# Altium PCB BEE-1012 PAY-IF V1.0.0.PcbDoc (part 2 of 7)
Units mm, origin at the board's own origin, x right, y up, seen from the top; angles counter-clockwise.
Board outline 93 x 90 mm, 6 copper layers (Top_1, GND_2, SIGNAL_3, PWR_4, GND_5, Bottom_6), stack 1.606 mm thick; 497 components, 371 nets, 2212 pads, 1215 vias.
Unrouted connection lines stored in the file: 56.
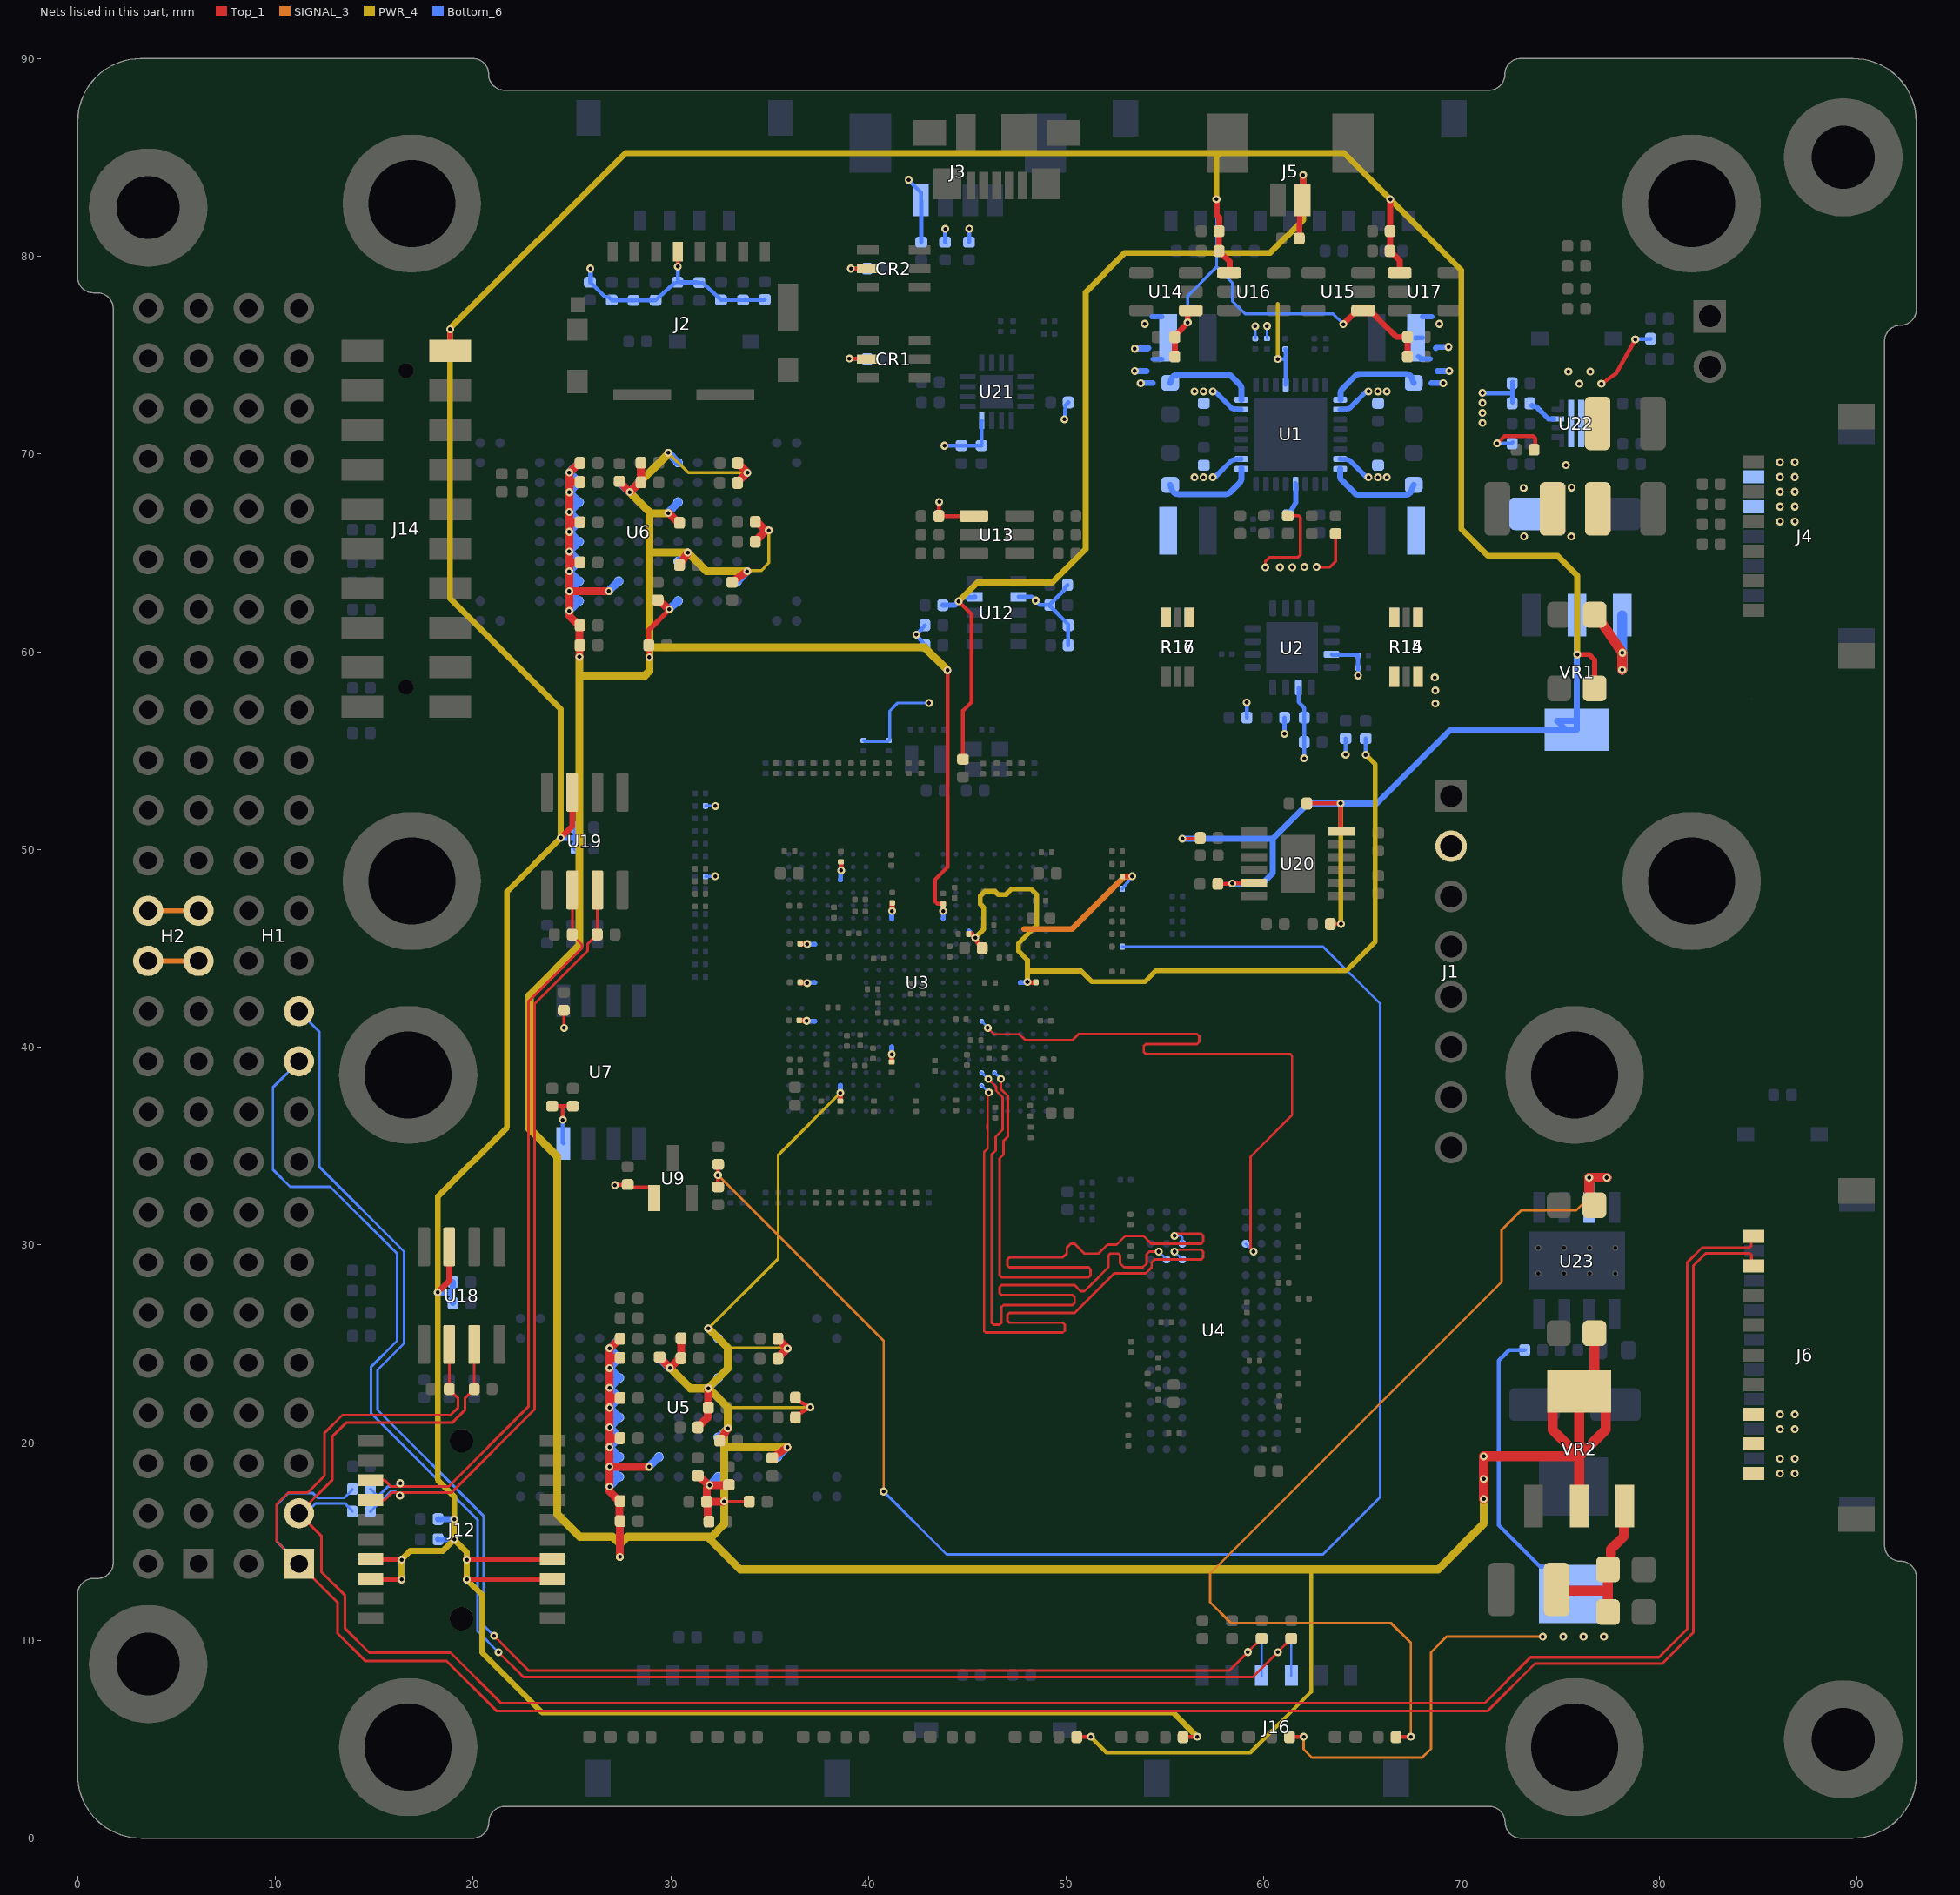
[diagram p6: the nets of this part, all layers, seen from the top]

## Footprints (in the part's own frame and the unit in brackets; to place one, negate y for a bottom-side part, rotate by r counter-clockwise, add the part's x,y. Pads: shape width x height; smd on the part's side, far side on the other; paste and mask are expansions set on the pad) (continued)
MOLEX_5040500891 [mm]
  rect 0.6x1 smd mask+0.076: 1(5.25,-2.87) 2(3.75,-2.87) 3(2.25,-2.87) 4(0.75,-2.87) 5(-0.75,-2.87) 6(-2.25,-2.87) 7(-3.75,-2.87) 8(-5.25,-2.87)
  rect 1.25x1.8 smd mask+0.076: M1(7.855,2.32) M2(-7.855,2.32)
  silkscreen extent -8.27,-3.7 8.27,3.22, body extent -8.27,-3.2 8.27,3.24, height 2
MOLEX_5040500991 [mil]
  rect 26x41 smd paste+0 mask+0: 1(236.22,-119.76) 2(177.17,-119.76) 3(118.11,-119.76) 4(59.06,-119.76) 5(0,-119.76) 6(-59.06,-119.76) 7(-118.11,-119.76) 8(-177.17,-119.76) 9(-236.22,-119.76)
  rect 51x73 smd: M1(-326.97,84.57) M2(326.97,84.57)
  silkscreen extent -344,-150 344,125, body extent -355,-126 355,128, height 79
MSOP-12_MSE_LIT [mil]
  rect 52.5x17 smd paste+0 mask+0: 1(-87.25,64) 2(-87.25,38.4) 3(-87.25,12.8) 4(-87.25,-12.8) 5(-87.25,-38.4) 6(-87.25,-64) 7(87.25,-64) 8(87.25,-38.4) 9(87.25,-12.8) 10(87.25,12.8) 11(87.25,38.4) 12(87.25,64)
  rect 69x116 smd paste-57.5 mask+0: 13(0,0)
  silkscreen extent -138,-86 66,86, body extent -99,-81 99,81, height 43
QFN50P300X300X80-17N [mm]
  rrect7% 0.83x0.26 smd mask+0.04: 1(-1.47,0.75) 2(-1.47,0.25) 3(-1.47,-0.25) 4(-1.47,-0.75) 9(1.47,-0.75) 10(1.47,-0.25) 11(1.47,0.25) 12(1.47,0.75)
  rrect7% 0.26x0.83 smd mask+0.04: 5(-0.75,-1.47) 6(-0.25,-1.47) 7(0.25,-1.47) 8(0.75,-1.47) 13(0.75,1.47) 14(0.25,1.47) 15(-0.25,1.47) 16(-0.75,1.47)
  rect 1.7x1.7 smd paste-0.2 mask+0.04: 17(0,0)
  silkscreen extent -2.6,-1.58 1.58,1.58, body extent -1.5,-1.5 1.5,1.5, height 0.8
QFN-32_5X5_EP3.7X3.7 [mm] "QFN32_5MMwith ePAD"
  rrect50% 0.7x0.3 smd mask+0.04: 1(-2.5,1.75) 2(-2.5,1.25) 3(-2.5,0.75) 4(-2.5,0.25) 5(-2.5,-0.25) 6(-2.5,-0.75) 7(-2.5,-1.25) 8(-2.5,-1.75) 17(2.5,-1.75) 18(2.5,-1.25) 19(2.5,-0.75) 20(2.5,-0.25) 21(2.5,0.25) 22(2.5,0.75) 23(2.5,1.25) 24(2.5,1.75)
  rrect50% 0.3x0.7 smd mask+0.04: 9(-1.75,-2.5) 10(-1.25,-2.5) 11(-0.75,-2.5) 12(-0.25,-2.5) 13(0.25,-2.5) 14(0.75,-2.5) 15(1.25,-2.5) 16(1.75,-2.5) 25(1.75,2.5) 26(1.25,2.5) 27(0.75,2.5) 28(0.25,2.5) 29(-0.25,2.5) 30(-0.75,2.5) 31(-1.25,2.5) 32(-1.75,2.5)
  rect 3.7x3.7 smd mask+0.05: 33(0,0)
  silkscreen extent -2.65,-2.65 2.65,2.68, body extent -2.56,-2.56 2.56,2.56, height 1.01
RES_C_0603X30 [mm] "Chip Resistor, 2-Leads, Body 0.6x0.3mm, IPC Medium Density"
  rrect50% 0.275x0.3 smd mask+0.05: 1(-0.262,0) 2(0.262,0)
  body extent -0.3,-0.15 0.3,0.15, height 0.22
RES_C_1005x30_L [mm] "Chip Resistor, 2-Leads, Body 1.0x0.5mm, IPC Medium Density"
  rrect50% 0.55x0.6 smd mask+0.05: 1(-0.45,0) 2(0.45,0)
  body extent -0.5,-0.3 0.5,0.3, height 0.2
RES_C_1206_SHUNT [mm] "Chip Resistor, 2-Leads, Body 3.2x1.6mm, IPC Medium Density"
  rect 1x0.5 smd mask+0.1: 1(-1.5,0.6) 1(-1.5,-0.6) 2(1.5,0.6) 2(1.5,-0.6)
  rect 1x0.35 smd mask+0.1: 3(-1.5,0) 4(1.5,0)
  silkscreen extent -0.6,-0.77 0.6,0.78, body extent -1.6,-0.8 1.6,0.8, height 1
SAMTEC-TLE-110-01-X-DV-A [mm]
  rect 1.12x2.11 smd mask+0: 1(-9,-2.222) 2(-9,2.222) 3(-7,-2.222) 4(-7,2.222) 5(-5,-2.222) 6(-5,2.222) 7(-3,-2.222) 8(-3,2.222) 9(-1,-2.222) 10(-1,2.222) 11(1,-2.222) 12(1,2.222) 13(3,-2.222) 14(3,2.222) 15(5,-2.222) 16(5,2.222) 17(7,-2.222) 18(7,2.222) 19(9,-2.222) 20(9,2.222)
  round 0.76 hole 0.76 unplated: ""(-8,0) ""(8,0)
  silkscreen extent -10.45,-4.44 10.45,3.73, body extent -9.99,-2.78 9.99,2.78, height 4.32
SAMTEC_ESQ-126-14-G-D [mm]
  rect 1.53x1.53 hole 0.9: 01(0,0)
  round 1.53 hole 0.9: 02(0,2.54) 03(2.54,0) 04(2.54,2.54) 05(5.08,0) 06(5.08,2.54) 07(7.62,0) 08(7.62,2.54) 09(10.16,0) 10(10.16,2.54) 11(12.7,0) 12(12.7,2.54) 13(15.24,0) 14(15.24,2.54) 15(17.78,0) 16(17.78,2.54) 17(20.32,0) 18(20.32,2.54) 19(22.86,0) 20(22.86,2.54) 21(25.4,0) 22(25.4,2.54) 23(27.94,0) 24(27.94,2.54) 25(30.48,0) 26(30.48,2.54) 27(33.02,0) 28(33.02,2.54) 29(35.56,0) 30(35.56,2.54) 31(38.1,0) 32(38.1,2.54) 33(40.64,0) 34(40.64,2.54) 35(43.18,0) 36(43.18,2.54) 37(45.72,0) 38(45.72,2.54) 39(48.26,0) 40(48.26,2.54) 41(50.8,0) 42(50.8,2.54) 43(53.34,0) 44(53.34,2.54) 45(55.88,0) 46(55.88,2.54) 47(58.42,0) 48(58.42,2.54) 49(60.96,0) 50(60.96,2.54) 51(63.5,0) 52(63.5,2.54)
  silkscreen extent -2.27,-1.2 65.03,3.74, body extent -1.52,-1.27 65.02,3.81, height 11.1
SAMTEC_FSI-110-03-X-D-AD-TR [mm]
  rect 0.61x1.26 smd: 01(-4.5,4.59) 02(-3.5,4.59) 03(-2.5,4.59) 04(-1.5,4.59) 05(-0.5,4.59) 06(0.5,4.59) 07(1.5,4.59) 08(2.5,4.59) 09(3.5,4.59) 10(4.5,4.59) 11(4.5,-4.59) 12(3.5,-4.59) 13(2.5,-4.59) 14(1.5,-4.59) 15(0.5,-4.59) 16(-0.5,-4.59) 17(-1.5,-4.59) 18(-2.5,-4.59) 19(-3.5,-4.59) 20(-4.5,-4.59)
  round 1.19 hole 1.19 unplated: ""(-4.5,0) ""(4.5,0)
  silkscreen extent -5.38,-4.38 5.38,5.9, body extent -5.38,-5 5.38,5, height 4.37
SOD123_MCC [mil]
  rect 34x28 smd paste+0: 1(-73,0) 2(73,0)
  silkscreen extent -88,-38 61,42, body extent -76,-33 76,33, height 53
SOIC127P599X175-8N [mm]
  rrect25% 1.97x0.6 smd paste+0 mask+0.102: 1(-2.47,1.905) 2(-2.47,0.635) 3(-2.47,-0.635) 4(-2.47,-1.905) 5(2.47,-1.905) 6(2.47,-0.635) 7(2.47,0.635) 8(2.47,1.905)
  silkscreen extent -4.14,-2.52 1.95,2.52, body extent -3,-2.45 3,2.45, height 1.75
SOIC127P790X216-8N [mm]
  rect 1.65x0.7 smd: 1(-3.6,1.905) 2(-3.6,0.635) 3(-3.6,-0.635) 4(-3.6,-1.905) 5(3.6,-1.905) 6(3.6,-0.635) 7(3.6,0.635) 8(3.6,1.905)
  silkscreen extent -4.27,-2.62 2.42,2.62, body extent -3.95,-2.62 3.95,2.62, height 2.16
SOT-23_MC_MCH [mil]
  rect 24x52 smd paste+0 mask+0: 1(-37.4,-39.97) 2(37.4,-39.97) 3(0,39.97)
  silkscreen extent -65,-94 65,33, body extent -60,-52 60,52, height 44
SRP7050TA-220M [mm]
  rect 2.95x3.5 smd: 1(-2.725,0) 2(2.725,0)
  silkscreen extent -4.4,-3.3 4.4,3.3, body extent -3.65,-3.3 3.65,3.3, height 4.6
SW2-SMD [mm]
  rect 1.2x0.8 smd: 1(-3.5,0) 2(3.5,0)
  silkscreen extent -2.82,-1.85 2.82,1.85, body extent -3.05,-1.85 3.05,1.85, height 2.5
TFBGA-343_14X14 [mm] "BGA, 343-Leads, Body 14,00mm x14,00mm, Pitch 0,65mm"
  round 0.25 smd mask+0.05: A1(-6.5,6.5) A2(-5.85,6.5) A3(-5.2,6.5) A4(-4.55,6.5) A5(-3.9,6.5) A6(-3.25,6.5) A7(-2.6,6.5) A8(-1.95,6.5) A9(-1.3,6.5) A11(0,6.5) A13(1.3,6.5) A14(1.95,6.5) A15(2.6,6.5) A16(3.25,6.5) A17(3.9,6.5) A18(4.55,6.5) A19(5.2,6.5) A20(5.85,6.5) A21(6.5,6.5) AA1(-6.5,-6.5) AA2(-5.85,-6.5) AA3(-5.2,-6.5) AA4(-4.55,-6.5) AA5(-3.9,-6.5) AA6(-3.25,-6.5) AA7(-2.6,-6.5) AA8(-1.95,-6.5) AA9(-1.3,-6.5) AA11(0,-6.5) AA13(1.3,-6.5) AA14(1.95,-6.5) AA15(2.6,-6.5) AA16(3.25,-6.5) AA17(3.9,-6.5) AA18(4.55,-6.5) AA19(5.2,-6.5) AA20(5.85,-6.5) AA21(6.5,-6.5) B1(-6.5,5.85) B2(-5.85,5.85) B3(-5.2,5.85) B4(-4.55,5.85) B6(-3.25,5.85) B7(-2.6,5.85) B9(-1.3,5.85) B13(1.3,5.85) B15(2.6,5.85) B16(3.25,5.85) B18(4.55,5.85) B19(5.2,5.85) B20(5.85,5.85) B21(6.5,5.85) C1(-6.5,5.2) C2(-5.85,5.2) C3(-5.2,5.2) C4(-4.55,5.2) C5(-3.9,5.2) C6(-3.25,5.2) C7(-2.6,5.2) C8(-1.95,5.2) C11(0,5.2) C14(1.95,5.2) C15(2.6,5.2) C16(3.25,5.2) C17(3.9,5.2) C18(4.55,5.2) C19(5.2,5.2) C20(5.85,5.2) C21(6.5,5.2) D1(-6.5,4.55) D2(-5.85,4.55) D3(-5.2,4.55) D4(-4.55,4.55) D5(-3.9,4.55) D6(-3.25,4.55) D7(-2.6,4.55) D8(-1.95,4.55) D9(-1.3,4.55) D13(1.3,4.55) D14(1.95,4.55) D15(2.6,4.55) D16(3.25,4.55) D17(3.9,4.55) D18(4.55,4.55) D19(5.2,4.55) D20(5.85,4.55) D21(6.5,4.55) E1(-6.5,3.9) E3(-5.2,3.9) E4(-4.55,3.9) E5(-3.9,3.9) E6(-3.25,3.9) E7(-2.6,3.9) E8(-1.95,3.9) E14(1.95,3.9) E15(2.6,3.9) E16(3.25,3.9) E17(3.9,3.9) E18(4.55,3.9) E19(5.2,3.9) E21(6.5,3.9) F1(-6.5,3.25) F2(-5.85,3.25) F3(-5.2,3.25) F4(-4.55,3.25) F5(-3.9,3.25) F6(-3.25,3.25) F7(-2.6,3.25) F8(-1.95,3.25) F9(-1.3,3.25) F13(1.3,3.25) F14(1.95,3.25) F15(2.6,3.25) F16(3.25,3.25) F17(3.9,3.25) F18(4.55,3.25) F19(5.2,3.25) F20(5.85,3.25) F21(6.5,3.25) G1(-6.5,2.6) G2(-5.85,2.6) G3(-5.2,2.6) G4(-4.55,2.6) G5(-3.9,2.6) G6(-3.25,2.6) G7(-2.6,2.6) G8(-1.95,2.6) G9(-1.3,2.6) G10(-0.65,2.6) G11(0,2.6) G12(0.65,2.6) G13(1.3,2.6) G14(1.95,2.6) G15(2.6,2.6) G16(3.25,2.6) G17(3.9,2.6) G18(4.55,2.6) G19(5.2,2.6) G20(5.85,2.6) G21(6.5,2.6) H1(-6.5,1.95) H3(-5.2,1.95) H4(-4.55,1.95) H5(-3.9,1.95) H6(-3.25,1.95) H7(-2.6,1.95) H8(-1.95,1.95) H9(-1.3,1.95) H10(-0.65,1.95) H11(0,1.95) H12(0.65,1.95) H13(1.3,1.95) H14(1.95,1.95) H15(2.6,1.95) H16(3.25,1.95) H17(3.9,1.95) H18(4.55,1.95) H19(5.2,1.95) H21(6.5,1.95) J1(-6.5,1.3) J2(-5.85,1.3) J4(-4.55,1.3) J6(-3.25,1.3) J7(-2.6,1.3) J8(-1.95,1.3) J9(-1.3,1.3) J10(-0.65,1.3) J11(0,1.3) J12(0.65,1.3) J13(1.3,1.3) J14(1.95,1.3) J15(2.6,1.3) J16(3.25,1.3) J18(4.55,1.3) J20(5.85,1.3) J21(6.5,1.3) K7(-2.6,0.65) K8(-1.95,0.65) K9(-1.3,0.65) K10(-0.65,0.65) K11(0,0.65) K12(0.65,0.65) K13(1.3,0.65) K14(1.95,0.65) K15(2.6,0.65) L1(-6.5,0) L3(-5.2,0) L7(-2.6,0) L8(-1.95,0) L9(-1.3,0) L11(0,0) L13(1.3,0) L14(1.95,0) L15(2.6,0) L19(5.2,0) L21(6.5,0) M7(-2.6,-0.65) M8(-1.95,-0.65) M9(-1.3,-0.65) M10(-0.65,-0.65) M11(0,-0.65) M12(0.65,-0.65) M13(1.3,-0.65) M14(1.95,-0.65) M15(2.6,-0.65) N1(-6.5,-1.3) N2(-5.85,-1.3) N4(-4.55,-1.3) N6(-3.25,-1.3) N7(-2.6,-1.3) N8(-1.95,-1.3) N9(-1.3,-1.3) N10(-0.65,-1.3) N11(0,-1.3) N12(0.65,-1.3) N13(1.3,-1.3) N14(1.95,-1.3) N15(2.6,-1.3) N16(3.25,-1.3) N18(4.55,-1.3) N20(5.85,-1.3) N21(6.5,-1.3) P1(-6.5,-1.95) P3(-5.2,-1.95) P4(-4.55,-1.95) P5(-3.9,-1.95) P6(-3.25,-1.95) P7(-2.6,-1.95) P8(-1.95,-1.95) P9(-1.3,-1.95) P10(-0.65,-1.95) P11(0,-1.95) P12(0.65,-1.95) P13(1.3,-1.95) P14(1.95,-1.95) P15(2.6,-1.95) P16(3.25,-1.95) P17(3.9,-1.95) P18(4.55,-1.95) P19(5.2,-1.95) P21(6.5,-1.95) R1(-6.5,-2.6) R2(-5.85,-2.6) R3(-5.2,-2.6) R4(-4.55,-2.6) R5(-3.9,-2.6) R6(-3.25,-2.6) R7(-2.6,-2.6) R8(-1.95,-2.6) R9(-1.3,-2.6) R10(-0.65,-2.6) R11(0,-2.6) R12(0.65,-2.6) R13(1.3,-2.6) R14(1.95,-2.6) R15(2.6,-2.6) R16(3.25,-2.6) R17(3.9,-2.6) R18(4.55,-2.6) R19(5.2,-2.6) R20(5.85,-2.6) R21(6.5,-2.6) T1(-6.5,-3.25) T2(-5.85,-3.25) T3(-5.2,-3.25) T4(-4.55,-3.25) T5(-3.9,-3.25) T6(-3.25,-3.25) T7(-2.6,-3.25) T8(-1.95,-3.25) T9(-1.3,-3.25) T13(1.3,-3.25) T14(1.95,-3.25) T15(2.6,-3.25) T16(3.25,-3.25) T17(3.9,-3.25) T18(4.55,-3.25) T19(5.2,-3.25) T20(5.85,-3.25) T21(6.5,-3.25) U1(-6.5,-3.9) U3(-5.2,-3.9) U4(-4.55,-3.9) U5(-3.9,-3.9) U6(-3.25,-3.9) U7(-2.6,-3.9) U8(-1.95,-3.9) U14(1.95,-3.9) U15(2.6,-3.9) U16(3.25,-3.9) U17(3.9,-3.9) U18(4.55,-3.9) U19(5.2,-3.9) U21(6.5,-3.9) V1(-6.5,-4.55) V2(-5.85,-4.55) V3(-5.2,-4.55) V4(-4.55,-4.55) V5(-3.9,-4.55) V6(-3.25,-4.55) V7(-2.6,-4.55) V8(-1.95,-4.55) V9(-1.3,-4.55) V13(1.3,-4.55) V14(1.95,-4.55) V15(2.6,-4.55) V16(3.25,-4.55) V17(3.9,-4.55) V18(4.55,-4.55) V19(5.2,-4.55) V20(5.85,-4.55) V21(6.5,-4.55) W1(-6.5,-5.2) W2(-5.85,-5.2) W3(-5.2,-5.2) W4(-4.55,-5.2) W5(-3.9,-5.2) W6(-3.25,-5.2) W7(-2.6,-5.2) W8(-1.95,-5.2) W11(0,-5.2) W14(1.95,-5.2) W15(2.6,-5.2) W16(3.25,-5.2) W17(3.9,-5.2) W18(4.55,-5.2) W19(5.2,-5.2) W20(5.85,-5.2) W21(6.5,-5.2) Y1(-6.5,-5.85) Y2(-5.85,-5.85) Y3(-5.2,-5.85) Y4(-4.55,-5.85) Y6(-3.25,-5.85) Y7(-2.6,-5.85) Y9(-1.3,-5.85) Y13(1.3,-5.85) Y15(2.6,-5.85) Y16(3.25,-5.85) Y18(4.55,-5.85) Y19(5.2,-5.85) Y20(5.85,-5.85) Y21(6.5,-5.85)
  silkscreen extent -7.15,-7.15 7.15,7.15, body extent -7,-7 7,7, height 1.22
TPL5010DDCR [mm]
  rrect25% 1.45x0.59 smd: 1(-1.155,0.95) 2(-1.155,0) 3(-1.155,-0.95) 4(1.155,-0.95) 5(1.155,0) 6(1.155,0.95)
  silkscreen extent -2.5,-1.57 0.8,1.57, body extent -1.4,-1.45 1.4,1.45, height 1.1
TWBGA96_ISI [mm]
  round 0.406 smd paste+0 mask+0: A1(-3.2,6) A2(-2.4,6) A3(-1.6,6) A7(1.6,6) A8(2.4,6) A9(3.2,6) B1(-3.2,5.2) B2(-2.4,5.2) B3(-1.6,5.2) B7(1.6,5.2) B8(2.4,5.2) B9(3.2,5.2) C1(-3.2,4.4) C2(-2.4,4.4) C3(-1.6,4.4) C7(1.6,4.4) C8(2.4,4.4) C9(3.2,4.4) D1(-3.2,3.6) D2(-2.4,3.6) D3(-1.6,3.6) D7(1.6,3.6) D8(2.4,3.6) D9(3.2,3.6) E1(-3.2,2.8) E2(-2.4,2.8) E3(-1.6,2.8) E7(1.6,2.8) E8(2.4,2.8) E9(3.2,2.8) F1(-3.2,2) F2(-2.4,2) F3(-1.6,2) F7(1.6,2) F8(2.4,2) F9(3.2,2) G1(-3.2,1.2) G2(-2.4,1.2) G3(-1.6,1.2) G7(1.6,1.2) G8(2.4,1.2) G9(3.2,1.2) H1(-3.2,0.4) H2(-2.4,0.4) H3(-1.6,0.4) H7(1.6,0.4) H8(2.4,0.4) H9(3.2,0.4) J1(-3.2,-0.4) J2(-2.4,-0.4) J3(-1.6,-0.4) J7(1.6,-0.4) J8(2.4,-0.4) J9(3.2,-0.4) K1(-3.2,-1.2) K2(-2.4,-1.2) K3(-1.6,-1.2) K7(1.6,-1.2) K8(2.4,-1.2) K9(3.2,-1.2) L1(-3.2,-2) L2(-2.4,-2) L3(-1.6,-2) L7(1.6,-2) L8(2.4,-2) L9(3.2,-2) M1(-3.2,-2.8) M2(-2.4,-2.8) M3(-1.6,-2.8) M7(1.6,-2.8) M8(2.4,-2.8) M9(3.2,-2.8) N1(-3.2,-3.6) N2(-2.4,-3.6) N3(-1.6,-3.6) N7(1.6,-3.6) N8(2.4,-3.6) N9(3.2,-3.6) P1(-3.2,-4.4) P2(-2.4,-4.4) P3(-1.6,-4.4) P7(1.6,-4.4) P8(2.4,-4.4) P9(3.2,-4.4) R1(-3.2,-5.2) R2(-2.4,-5.2) R3(-1.6,-5.2) R7(1.6,-5.2) R8(2.4,-5.2) R9(3.2,-5.2) T1(-3.2,-6) T2(-2.4,-6) T3(-1.6,-6) T7(1.6,-6) T8(2.4,-6) T9(3.2,-6)
  silkscreen extent -5.31,-7.3 5.31,7.3, body extent -5.05,-7.05 5.05,7.05, height 1.2
UQFN-16_4X4_EP2.6X2.6 [mm]
  rrect50% 0.8x0.35 smd paste+0 mask+0.075: 1(-2,0.975) 2(-2,0.325) 3(-2,-0.325) 4(-2,-0.975) 9(2,-0.975) 10(2,-0.325) 11(2,0.325) 12(2,0.975)
  rrect50% 0.35x0.8 smd paste+0 mask+0.057: 5(-0.975,-2) 6(-0.325,-2) 7(0.325,-2) 8(0.975,-2) 13(0.975,2) 14(0.325,2) 15(-0.325,2) 16(-0.975,2)
  rect 2.6x2.6 smd paste-0.25 mask+0.075: 17(0,0)
  silkscreen extent -2.15,-2.15 2.15,2.15, body extent -2,-2 2,2, height 0.5
VQFN-HR-10 [mm]
  rect 0.65x0.3 smd: 1(-0.938,0.692) 4(-0.941,-0.708) 7(0.909,-0.708) 10(0.909,0.692)
  rect 0.25x0.65 smd: 1(-0.738,0.867) 4(-0.741,-0.883) 7(0.709,-0.883) 10(0.709,0.867)
  rect 0.65x0.25 smd: 2(-0.938,0.216) 3(-0.941,-0.233) 8(0.909,-0.233) 9(0.909,0.216)
  rect 0.3x2.4 smd: 5(-0.265,-0.008) 6(0.235,-0.007)
  silkscreen extent -1.3,-1.25 1.28,1.23, body extent -1.03,-1.01 0.97,0.99, height 1
VREG_LM1117MP-3.3/NOPB [mm]
  rect 2.15x0.95 smd: 1(-2.9,2.3) 2(-2.9,0) 3(-2.9,-2.3)
  rect 2.15x3.25 smd: 4(2.9,0)
  silkscreen extent -4.7,-3.25 1.75,3.25, body extent -3.5,-3.25 3.5,3.25, height 1.8
XTAL_ECS2401037B2JTNTR [mm]
  rect 0.85x0.75 smd paste+0 mask+0.102: 1(-0.675,-0.525) 2(0.675,-0.525) 3(0.675,0.525) 4(-0.675,0.525)
  silkscreen extent -0.78,-1.57 -0.58,-1.37, body extent -1,-0.8 1,0.8, height 0.5

## Part data
BT1: library part BT2, "Switch button 2 pin"
C1 C2 C3 C4 C5 C6 C7 C8 C9 C10 C11 C12 C13 C14 C15 C16 C17 C18 C19 C20 C21 C22 C23 C24 C25 C26 C27 C28 C29 C30 C31 C32 C33 C34 C35 C36 C37 C38 C39 C40 C41 C42 C43 C44 C45 C46 C47 C48 C49 C50 C51 C52 C53 C54 C55 C56 C57 C58 C59 C60 C61 C62 C63 C64 C65 C66 C67 C68 C69 C70 C71 C72 C73 C74 C75 C76 C77 C78 C79 C80 C81 C82 C83 C84 C85 C86 C87 C88 C89 C90 C91 C92 C93 C94 C95 C96 C97 C98 C99 C100 C101 C102 C103 C104 C105 C106 C107 C108 C109 C110 C111 C112 C113 C114 C115 C116 C117 C118 C119 C120 C121 C122 C123 C124 C125 C126 C127 C128 C129 C130 C131 C132 C133 C134 C135 C136 C137 C138 C139 C140 C143 C144 C145 C146 C147 C148 C149 C150 C151 C153 C154 C155 C156 C157 C158 C159 C160 C161 C162 C163 C164 C168 C169 C170 C171 C176 C181 C182: library part _CAP_C_2, "CAP CHIP"
C165 C166 C167 C173 C174 C175 C177 C178 C179 C180: library part _CAP_C_High_2, "CAP CHIP High Value"
CR1 CR2: "TVS DIODE 5.5VWM 6TSOP", Manufacturer_Name=Nexperia, Copyright="Copyright (C) 2025 Ultra Librarian. All rights reserved.", Manufacturer_Part_Number=IP4220CZ6,125, RefDes=RefDes, TYPE=Type
D1 D2 D12: library part LED_BLUE
D3 D9 D10: library part LED_GREEN, "LED GREEN CLEAR 0402 SMD"
D4: library part LED_RED, "LED RED CLEAR 0402 SMD"
D5 D7: "DIODE SCHOTTKY 40V 5A SMA", MPN=SS34, Solder=SMT
D6 D11 D13: "Description", Manufacturer_Name=MCC, Copyright="Copyright (C) 2026 Ultra Librarian. All rights reserved.", Manufacturer_Part_Number=1N4148W-TP
D8: library part LED_YELLOW, "LED YELLOW CLEAR 0402 SMD"
H1 H2: "CONN SOCKET 52POS 0.1 GOLD PCB", Package=None, Availability=Unavailable, MF=Samtec, MP=ESQ-126-14-G-D, Price=None
H3 H4 H5 H6 H7 H8 H9 H10: library part M4.4, "WA-SMSI SMT Steel Spacer with / internal Thread"
J2: "9 (8 + 1) Position Card Connector Secure Digital - microSDâ„¢ Surface Mount, Right Angle Gold", Package=None, Check_prices=https://www.snapeda.com/parts/1051620001/Molex/view-part/?ref=eda, MF=Molex, MP=1051620001, SnapEDA_Link=https://www.snapeda.com/parts/1051620001/Molex/view-part/?ref=snap
J3 J13: library part "Header 4x1_2M"
J4: "1.50mm Pitch, Pico-Lock PCB Header, Single Row, Right-Angle, Surface Mount, Gold (Au) Plating, Positive Lock, 5 Circuits, Tape and Reel", Manufacturer_Name="Molex Connector Corporation", Copyright="Copyright (C) 2025 Ultra Librarian. All rights reserved.", Manufacturer_Part_Number=5040500591, RefDes=RefDes, TYPE=Type
J5: library part "Header 2x1_2M"
J6 J11: "Connector Header Surface Mount, Right Angle 9 position 0.059\" (1.50mm)"
J7: "Connector Header Surface Mount, Right Angle 8 position 0.059\" (1.50mm)`"
J8 J15 J16: "1.50mm Pitch, Pico-Lock PCB Header, Single Row, Right-Angle, Surface Mount, Gold (Au) Plating, Positive Lock, 6 Circuits, Tape and Reel", Manufacturer_Name="Molex Connector Corporation", Copyright="Copyright (C) 2025 Ultra Librarian. All rights reserved.", Datasheet=https://www.molex.com/en-us/products/part-detail-pdf/5040500691?display=pdf, Manufacturer_Part_Number=5040500691, RefDes=RefDes, TYPE=Type
J12: library part FSI-110-03-X-D-AD-TR, "CONN STACKING 20POS SMD GOLD", Package=None, Availability=Unavailable, MP=FSI-110-03-X-D-AD-TR, Price=None
J14: library part SAMTEC-TLE-110-01-X-DV-A, "CONN RCPT 20POS 0.079 GOLD SMD", Package=None, Availability=Unavailable, MP=SAMTEC-TLE-110-01-X-DV-A, Price=None
L1 L2 L3 L4: library part DFE252012P-1R5M=P2, "Fixed Inductor 1.5uH 3.5A R060 SMD", Package=None, Availability=Unavailable, MP=DFE252012P-1R5M=P2, Price=None
L5: library part _IND, "FIXED IND 22UH 2.5A 170 MOHM SMD"
R1 R2 R3 R4 R5 R6 R7 R8 R9 R10 R11 R12 R13 R18 R19 R20 R21 R22 R23 R24 R25 R26 R27 R28 R29 R30 R31 R32 R33 R34 R35 R36 R37 R38 R39 R40 R41 R42 R43 R44 R45 R46 R47 R48 R49 R50 R51 R52 R53 R54 R55 R56 R57 R58 R59 R60 R61 R62 R63 R64 R65 R66 R67 R68 R69 R70 R71 R72 R73 R74 R75 R76 R77 R78 R79 R80 R81 R82 R83 R84 R85 R86 R87 R88 R89 R90 R91 R92 R93 R94 R95 R96 R97 R98 R99 R100 R101 R102 R103 R104 R105 R106 R107 R108 R109 R110 R111 R112 R113 R114 R115 R116 R117 R118 R119 R120 R121 R122 R123 R124 R125 R126 R127 R128 R129 R130 R131 R132 R133 R134 R135 R136 R137 R138 R139 R140 R141 R142 R143 R144 R145 R146 R147 R148 R149 R150 R151 R152 R153 R154 R155 R156 R157 R158 R159 R160 R161 R164 R165 R166 R167 R168 R169 R170 R171 R172 R173 R174 R175 R176 R177 R178 R179 R180 R181 R182 R184 R185 R186 R187 R188 R189 R190 R191 R192 R193 R194 R195 R196 R197 R198 R199 R200 R201 R202 R203 R204 R205 R206 R207 R208 R209 R210 R211 R212 R213 R214 R215 R216 R217 R218 R219 R220 R221 R222 R223 R224 R225 R226 R227 R228 R229 R230 R231 R232 R233 R234 R235 R236 R237 R238 R239 R240 R241 R242 R243: library part _RES_B_2, "RES"
R14 R15 R16 R17: library part SHUNT, "Shunt Resistor, RES 0.047 OHM 1% 3/4W 1206", Current=4A, Manufacturer 1=SUSUMU, Manufacturer Part Number 1=KRL1632E-M-R047-F-T5, Operating Temperature="-55C to 155C", Package=1206, Power=3/4W, Supplier Part Number 1=408-1578-2-ND, Temperature Coefficient=±50ppm/C, Tolerance=1%, Category=Resistor, ComponentLink1Description="SVN Datasheet", ComponentLink1URL=https://chn-vm-apps.microchip.com/mchprepo/parts/Datasheets/n_catalog_partition09_en.pdf, ComponentLink2Description="Local Datasheet", ComponentLink2URL=C:\ALTIUM_WORK\00001_MCHP-CDB\Datasheets\n_catalog_partition09_en.pdf, ComponentLink3Description="Open Symbol", ComponentLink3URL="C:\ALTIUM_WORK\00001_MCHP-CDB\Library\LibraryRefs\Shunt 4 Pin.SchLib", ComponentLink4Description="Open Footprint", ComponentLink4URL=C:\ALTIUM_WORK\00001_MCHP-CDB\Library\Footprints\RES_C_1206_SHUNT.PcbLib, ComponentLink5Description="Open Footprint 2", ComponentLink6Description="Open Footprint 3", ComponentLink7Description="Open Footprint 4", Composition=MF, Description_="RES SHUNT MF 0.047R 1% 3/4W SMD 1206", Dev Tools Status=Design, MCHP-ID=RSMT1405, Owner="Ciprian Abramov", Populated=YES, Quantity Override=1, Restricted Sourcing=No, Revision=1, Status="MCL Design", Supplier 1=Digi-Key, Symbol="Shunt 4 Pin", TYPE=Shunt
U1: library part MIC8878, Manufacturer 1="Microchip Technology", Manufacturer Part Number 1=MCP16502TAB-E/S8B, Supplier Part Number 1=150-MCP16502TAB-E/S8BCT-ND, Category=MCHP-Analog, ComponentLink1Description="SVN Datasheet", ComponentLink2Description="Local Datasheet", ComponentLink2URL=C:\ALTIUM_WORK\00001_MCHP-CDB\Datasheets\MCP16502-High-Performance-PMIC-for-SAMA5DX-SAM9X6-MPUs-Data-Sheet-DS20006275B.pdf, ComponentLink3Description="Open Symbol", ComponentLink3URL="C:\ALTIUM_WORK\00001_MCHP-CDB\Library\LibraryRefs\MCP16502 QFN-32.SchLib", ComponentLink4Description="Open Footprint", ComponentLink4URL=C:\ALTIUM_WORK\00001_MCHP-CDB\Library\Footprints\QFN-32_5X5_EP3.7X3.7.PcbLib, ComponentLink5Description="Open Footprint 2", ComponentLink6Description="Open Footprint 3", ComponentLink7Description="Open Footprint 4", Description_="MCHP ANALOG PMIC SWITCHER Buck ADJ MCP16502TAB-E/S8B QFN-32 for SAMA7G5 MPU with LPDDR/DDR2/DDR3", Dev Tools Status=Design, MCHP-ID=MIC8878, Owner="Dragos Danaila", Populated=YES, Quantity Override=1, Revision=1, Status="MCL Design", Supplier 1=Digi-Key, Symbol="MCP16502 QFN-32", TYPE=Switcher
U2: library part PAC1934T-I/JQ, "IC CURRENT MONITOR 1% 16UQFN", Manufacturer 1="Microchip Technology", Operating Temperature="-40C to +85C", Category=MCHP-Analog, ComponentLink1Description="SVN Datasheet", ComponentLink1URL=https://www.microchip.com/sitesearch/search/Product%20and%20Development%20Tools/PAC1934T-I/JQ, ComponentLink2Description="Local Datasheet", ComponentLink3Description="Open Symbol", ComponentLink3URL="C:\ALTIUM_WORK\00001_MCHP-CDB\Library\LibraryRefs\PAC1934 UQFN-16.SchLib", ComponentLink4Description="Open Footprint", ComponentLink4URL=C:\ALTIUM_WORK\00001_MCHP-CDB\Library\Footprints\UQFN-16_4X4_EP2.6X2.6.PcbLib, ComponentLink5Description="Open Footprint 2", ComponentLink6Description="Open Footprint 3", ComponentLink7Description="Open Footprint 4", Description_="MCHP ANALOG POWER CURRENT SENSE MONITOR PAC1934T-I/JQ UQFN-16", Dev Tools Status=Production, Manufacturer Part Number 1=PAC1934T-I/JQ, MCHP-ID=MIC7010, Owner="Razvan Cristescu", Populated=YES, Quantity Override=1, Restricted Sourcing=No, Revision=2, Status="MCL Design", Supplier 1="Microchip Technology", Supplier Part Number 1=PAC1934T-I/JQ, Symbol="PAC1934 UQFN-16", TYPE="Power/Current Sensor"
U3: "SAMA7D65 MPU 1000MHz Cortex-A7 TFBGA-343", Manufacturer 1="Microchip Technology", Manufacturer Part Number 1=SAMA7D65-V/4HB-SL3, Operating Temperature="-40C to +105C", Category=MCHP-Microcontroller, ComponentLink1Description="SVN Datasheet", ComponentLink1URL=https://www.microchip.com/sitesearch/search/Product%20and%20Development%20Tools/SAMA7D65-V/4HB-SL3, ComponentLink2Description="Local Datasheet", ComponentLink3Description="Open Symbol", ComponentLink3URL=C:\ALTIUM_WORK\00001_MCHP-CDB\Library\LibraryRefs\SAMA7D65-TFBGA-343.SchLib, ComponentLink4Description="Open Footprint", ComponentLink4URL=C:\ALTIUM_WORK\00001_MCHP-CDB\Library\Footprints\TFBGA-343_14x14.PcbLib, ComponentLink5Description="Open Footprint 2", ComponentLink6Description="Open Footprint 3", ComponentLink7Description="Open Footprint 4", Description_="MCHP MPU 32-BIT Cortex-A7 1000MHz 128kB SAMA7D65-V/4HB-SL3 TFBGA-343", Dev Tools Status=Design, MCHP-ID=IC2674, Owner="Ciprian Abramov", Populated=YES, Quantity Override=1, Restricted Sourcing=No, Revision=1, Status="MCL Design", Supplier 1="Microchip Technology", Supplier Part Number 1=SAMA7D65-V/4HB-SL3, Symbol=SAMA7D65-TFBGA-343, TYPE="32-Bit MPU"
U4: library part IC_RAM_IS43TR16512BL-125KBLI, "DDR3L", Manufacturer_Name=ISSI, Copyright="Copyright (C) 2025 Ultra Librarian. All rights reserved.", Manufacturer_Part_Number=IS43TR16512BL-125KBLI, RefDes=RefDes, TYPE=Type
U7: "MRAM Avalanche High Performance Serial P-SRAM 4Mb in SOIC8 package with QSPI - 108MHz interface, 3V, -40 C to 105 C", Manufacturer_Name="Avalanche Technology", Mouser Part Number=793-30042040108X0PSY, Datasheet Link=https://www.mouser.ph/ProductDetail/Avalanche-Technology/AS3004204-0108X0PSAY?qs=eP2BKZSCXI7G0ggegRejGg%3D%3D, Geometry.Height=2.16mm, Manufacturer_Part_Number=AS3004204-0108X0PSAY, Mouser Price/Stock=https://www.mouser.co.uk/ProductDetail/Avalanche-Technology/AS3004204-0108X0PSAY/?qs=eP2BKZSCXI7G0ggegRejGg%3D%3D
U8: "Micro-USB B Receptacle with Flange, Bottom Mount, Surface Mount, Lead-Free", Manufacturer_Name="Molex Connector Corporation", Copyright="Copyright (C) 2025 Ultra Librarian. All rights reserved.", Manufacturer_Part_Number=473460001, RefDes=RefDes, TYPE=Type
U9: "SENSOR ANALOG -40C-125C SOT23-3", Manufacturer_Name=Microchip, Copyright="Copyright (C) 2025 Ultra Librarian. All rights reserved.", Manufacturer_Part_Number=TC1047AVNBTR, RefDes=RefDes, TYPE=Type
U12: "Real-Time Clock Module with I2C-Bus", Package=None, Availability=Unavailable, MP=RV-3129-C3-32.768KHZ-OPTION-A-TB-QA, Price=None
U13: "OSC PROG TIMER TSOT23-6"
U14 U15: "Automotive LVDS Differential Driver"
U16 U17: "Automotive LVDS Differential Line Receiver"
U18 U19: "3.3 V CAN Transceiver with Standby Mode", Package="SOIC-8 Texas Instruments", Check_prices=https://www.snapeda.com/parts/SN65HVD230DR/Texas+Instruments/view-part/?ref=eda, MF="Texas Instruments", MP=SN65HVD230DR, SnapEDA_Link=https://www.snapeda.com/parts/SN65HVD230DR/Texas+Instruments/view-part/?ref=snap
U20: library part LTC2865HMSETRPBF, "Â±60V Fault Protected 3V to 5.5V RS485/RS422 Transceivers", Manufacturer_Name="Analog Devices Inc", Copyright="Copyright (C) 2025 Ultra Librarian. All rights reserved.", Manufacturer_Part_Number=LTC2865HMSE#TRPBF, RefDes=RefDes, TYPE=Type
U21: library part IC_USB_SW_FSUSB74MPX, "USB Switch IC 1 Channel 16-MLP (3x3)", Package="WQFN-16 ON Semiconductor", Check_prices=https://www.snapeda.com/parts/FSUSB74MPX/Onsemi/view-part/?ref=eda, MF="ON Semiconductor", MP=FSUSB74MPX, SnapEDA_Link=https://www.snapeda.com/parts/FSUSB74MPX/Onsemi/view-part/?ref=snap
U23: "5.5V to 36V Input, 3A, 500kHz Step-Down Converter", Package="HSOIC-8 Texas Instruments", Availability="In Stock", Check_prices=https://www.snapeda.com/parts/TPS5430DDAR/Texas+Instruments/view-part/?ref=eda, MF="Texas Instruments", MP=TPS5430DDAR, Price=None, Purchase-URL=https://pricing.snapeda.com/search/part/TPS5430DDAR/?ref=eda, SnapEDA_Link=https://www.snapeda.com/parts/TPS5430DDAR/Texas+Instruments/view-part/?ref=snap
VR1 VR2: "800-mA 15-V linear voltage regulator", Package="SOT-223-4 Texas Instruments", Check_prices=https://www.snapeda.com/parts/LM1117MP-3.3/NOPB/Texas+Instruments/view-part/?ref=eda, MF="Texas Instruments", MP=LM1117MP-3.3/NOPB, SnapEDA_Link=https://www.snapeda.com/parts/LM1117MP-3.3/NOPB/Texas+Instruments/view-part/?ref=snap
Y1: library part ECS-240-10-37B2-JTN-TR, "CRYSTAL 24 MHZ 10PF SMD", Load Capacitance=10pF, Manufacturer 1="ECS Inc", Operating Temperature="-40C to +85C", Package=L2.0W1.6H0.5, Supplier Part Number 1=50-ECS-240-10-37B2-JTN-TR-ND, Tolerance=20ppm, Category=Crystal/Oscillator, ComponentLink1Description="SVN Datasheet", ComponentLink1URL=https://chn-vm-apps.microchip.com/mchprepo/parts/Datasheets/ECX-1637B2.pdf, ComponentLink2Description="Local Datasheet", ComponentLink2URL=C:\ALTIUM_WORK\00001_MCHP-CDB\Datasheets\ECX-1637B2.pdf, ComponentLink3Description="Open Symbol", ComponentLink3URL="C:\ALTIUM_WORK\00001_MCHP-CDB\Library\LibraryRefs\Crystal 4 Pins.SchLib", ComponentLink4Description="Open Footprint", ComponentLink4URL=C:\ALTIUM_WORK\00001_MCHP-CDB\Library\Footprints\CRYSTAL_L2.0W1.6H0.5_FA-128.PcbLib, ComponentLink5Description="Open Footprint 2", ComponentLink6Description="Open Footprint 3", ComponentLink7Description="Open Footprint 4", Description_="CRYSTAL 24MHz 10pF SMD L2W1.6H0.5", Dev Tools Status=Design, Manufacturer Part Number 1=ECS-240-10-37B2-JTN-TR, MCHP-ID=OSC1299, Owner="Ciprian Abramov", Populated=YES, Quantity Override=1, Revision=1, Status="MCL Design", Supplier 1=Digi-Key, Symbol="Crystal 4 Pins", TYPE=Crystal
Y2: library part "FC-12M 32.7680KA-A3", "CRYSTAL 32.7680KHZ 12.5PF SMD", Load Capacitance=12.5pF, Manufacturer 1=Epson, Operating Temperature="-40°C ~ 85°C", Package="2-SMD, No Lead", Supplier Part Number 1=SER3672CT-ND, Tolerance=20ppm, Category=Crystal/Oscillator, ComponentLink1Description="SVN Datasheet", ComponentLink1URL=https://chn-vm-apps.microchip.com/mchprepo/parts/Datasheets/FC-12D_en.pdf, ComponentLink2Description="Local Datasheet", ComponentLink2URL=C:\ALTIUM_WORK\00001_MCHP-CDB\Datasheets\FC-12D_en.pdf, ComponentLink3Description="Open Symbol", ComponentLink3URL="C:\ALTIUM_WORK\00001_MCHP-CDB\Library\LibraryRefs\Crystal 2 Pins.SchLib", ComponentLink4Description="Open Footprint", ComponentLink4URL=C:\ALTIUM_WORK\00001_MCHP-CDB\Library\Footprints\CRYSTAL_FC-12M_L2.05W1.2H0.6.PcbLib, ComponentLink5Description="Open Footprint 2", ComponentLink6Description="Open Footprint 3", ComponentLink7Description="Open Footprint 4", Description_="CRYSTAL 32.768KHZ 12.5PF SMD 2-SMD, No Lead, FC-12M 32.7680KA-A3", Dev Tools Status=Design, Manufacturer Part Number 1="FC-12M 32.7680KA-A3", MCHP-ID=OSC1269, Owner="Dragos Danaila", Populated=YES, Quantity Override=1, Revision=1, Status="MCL Design", Supplier 1=Digikey, Symbol="Crystal 2 Pins", TYPE=Crystal

## Via types
v1: diameter 0.4, hole 0.2, Top_1 to Bottom_6, tented both sides, 1215 vias

## Nets (pads, with @x,y where several pads share a name; then routed paths per layer and width w, separated by ;. In a path a pad name is that pad's centre, name@x,y a point inside that pad or via, vN(x,y) a via of type N, cw(c..) or ccw(c..) an arc to the next point about the centre after c; other vN are vias at no path point)
3.3_VBAT: C144.2 C176.1 J5.1 R28.1 U12.9 | length 48.8
  Top_1 w0.2: v1(44.556,62.551) 45.212,61.895 45.212,57.447 44.781,57.016 R28.1@44.781,54.56
  Top_1 w0.3: C176.1@61.791,80.899 61.801,80.909 61.801,82.668 J5.1@61.958,82.825 61.972,82.84 61.972,84.096 v1(61.987,84.11)
  PWR_4 w0.3: v1(44.556,62.551) 45.505,63.5 49.296,63.5 50.982,65.186 50.982,78.177 52.971,80.166 60.321,80.166 61.987,81.832 v1(61.987,84.11)
  Bottom_6 w0.254: C144.2@43.757,62.357 44.362,62.357 v1(44.556,62.551) 44.75,62.745 45.351,62.745 U12.9@45.382,62.776
3V3: C6.2 C7.2 C8.2 C9.2 C41.2 C42.2 C43.2 C44.2 C47.2 C48.2 C49.2 C50.2 C51.2 C130.2 C131.2 C132.2 C134.2 C135.2 C136.2 C137.2 C140.2 C143.2 C145.2 C163.2 C164.2 CR1.5 CR2.5 J1.2 J2.P4 J3.1 R4.1 R5.1 R7.2 R8.2 R9.2 R10.2 R14.2 R18.1 R19.1 R36.1 R43.1 R51.1 R52.1 R54.1 R57.1 R122.1 R150.2 R151.2 R152.2 R153.2 R154.2 R155.2 R156.2 R157.1 R159.1 R160.1 R164.1 R165.1 R166.1 R197.2 U2.2 U2.15 U3.C17 U3.F13 U3.G7 U3.H19 U3.L3 U3.L19 U3.P19 U3.T13 U7.8 U9.1 U12.2 U13.1 U21.4 | length 116
  Top_1 w0.15: R157.1@24.587,41.866 24.593,41.86 24.593,40.984 v1(24.6,40.977) ; v1(60.071,64.262) 60.075,64.266 60.075,64.559 60.286,64.77 61.722,64.77 61.849,64.897 61.849,66.792 61.77,66.871 R122.1@61.214,66.871
  Top_1 w0.2: C134.2@24.003,37.015 24.526,37.015 ; v1(24.538,36.324) 24.526,36.336 24.526,37.015 ; C135.2@25.049,37.015 24.526,37.015 ; v1(27.178,33.02) 27.194,33.036 27.807,33.036 C137.2@27.823,33.052 27.96,32.915 28.954,32.915 29.159,32.71 U9.1@29.159,32.36 ; v1(30.357,79.478) J2.P4@30.357,80.226 ; v1(39.04,74.828) 39.052,74.816 39.961,74.816 CR1.5@39.973,74.803 ; v1(39.116,79.375) CR2.5@39.973,79.375 ; v1(43.576,67.571) 43.569,67.564 43.569,66.871 C145.2@43.561,66.863 U13.1@45.327,66.863 ; R19.1@52.84,48.641 v1(53.34,48.641)
  Top_1 w0.25: C51.2@36.501,41.358 36.513,41.345 36.862,41.345 v1(36.875,41.332) ; C49.2@36.543,43.283 36.543,43.273 36.556,43.261 36.881,43.261 v1(36.903,43.239) ; C42.2@36.543,45.233 36.555,45.221 36.891,45.221 v1(36.903,45.209) ; C44.2@38.606,49.37 38.611,49.365 38.611,48.946 v1(38.616,48.941) ; C47.2@41.174,39.256 41.174,39.633 v1(41.178,39.637) ; v1(41.189,46.887) 41.197,46.895 41.197,47.283 C41.2@41.206,47.295 ; C48.2@45.075,45.741 45.199,45.741 v1(45.403,45.537) 45.647,45.087 C50.2@45.728,44.937 ; v1(48.04,43.303) 48.069,43.274 48.429,43.274 C43.2@48.441,43.262
  SIGNAL_3 w0.3: 47.879,45.974 50.292,45.974 52.94,48.622 53.321,48.622 v1(53.34,48.641)
  PWR_4 w0.25: v1(45.403,45.537) 45.829,45.963 45.829,47.056 45.652,47.233 45.652,47.64 45.901,47.89 46.387,47.89 46.566,47.711 46.949,47.711 47.244,48.006 48.215,48.006 48.519,47.702 48.519,46.181 47.594,45.255 47.594,44.855 48.04,44.408 48.04,43.855 ; v1(48.04,43.303) 48.04,43.855 ; v1(65.151,54.785) 65.636,54.3 65.636,45.339 64.163,43.866 54.534,43.866 53.975,43.307 51.308,43.307 50.76,43.855 48.04,43.855
  Bottom_6 w0.127: R8.2@59.563,75.836 v1(59.563,76.462) ; R7.2@60.16,75.842 v1(60.16,76.468)
  Bottom_6 w0.15: R54.1@31.758,48.641 v1(32.25,48.641) ; R36.1@31.758,52.197 v1(32.258,52.197) ; R57.1@39.751,55.507 39.826,55.445 40.946,55.445 R43.1@41.021,55.507 41.07,55.556 41.07,57.006 41.467,57.404 v1(43.059,57.404) ; R18.1@52.84,48.006 52.903,48.081 v1(53.34,48.641)
  Bottom_6 w0.2: v1(24.538,36.324) 24.538,35.172 U7.8@24.573,35.137 ; R156.2@25.908,78.682 25.933,78.682 26.681,77.934 26.863,77.934 R152.2@27.015,77.782 27.018,77.778 29.225,77.778 R155.2@29.228,77.775 29.389,77.912 30.163,78.629 cw(c30.299,78.482) 30.173,78.637 C130.2@30.335,78.682 ; v1(30.357,79.478) 30.357,78.819 C130.2@30.335,78.682 ; R151.2@34.762,77.811 34.748,77.796 32.563,77.796 R154.2@32.549,77.782 32.411,77.92 31.645,78.616 ccw(c31.51,78.468) 31.604,78.644 C132.2@31.442,78.668 31.279,78.68 30.498,78.68 C130.2@30.335,78.682 ; v1(39.04,74.828) 39.052,74.816 39.923,74.816 C131.2@39.936,74.803 ; v1(39.116,79.375) C140.2@39.936,79.375 ; v1(42.034,83.86) 42.034,83.842 42.651,83.225 J3.1@42.651,82.825 42.672,82.804 C136.2@42.672,80.714 ; R52.1@42.857,60.325 42.72,60.487 v1(42.426,60.863) 42.72,61.179 R165.1@42.857,61.341 ; v1(43.847,70.419) 43.851,70.423 44.7,70.423 C163.2@44.704,70.427 C164.2@45.72,70.427 45.726,70.433 45.726,71.676 U21.4@45.732,71.682 ; R159.1@43.869,80.705 R159.1@43.878,80.714 43.878,81.376 v1(43.888,81.385) ; R160.1@45.085,80.714 45.094,80.723 45.094,81.385 v1(45.104,81.395) ; U12.2@47.582,62.776 48.265,62.776 v1(48.455,62.586) 48.678,62.363 C143.2@49.168,62.363 ; v1(49.911,71.755) R197.2@49.97,72.446 ; R197.2@49.955,72.336 49.955,72.457 R197.2@50.107,72.608 R197.2@49.97,72.446 ; 49.956,72.287 R197.2@49.97,72.446 ; R166.1@50.068,63.379 49.916,63.227 49.916,63.136 49.168,62.388 C143.2@49.168,62.363 ; R51.1@50.107,60.325 R164.1@50.107,61.341 50.107,61.383 49.168,62.321 C143.2@49.168,62.363 ; v1(59.13,57.431) 59.134,57.427 59.134,56.672 R4.1@59.139,56.668 ; v1(61.044,55.848) R5.1@61.044,56.668 ; U2.2@61.752,58.192 61.752,57.451 62.049,57.154 C6.2@62.049,56.668 62.044,56.663 62.044,55.428 C7.2@62.039,55.423 v1(62.039,54.603) ; U2.15@63.427,59.867 63.464,59.83 C8.2@64.749,59.83 ; v1(64.135,54.795) R10.2@64.135,55.615 ; C8.2@64.762,59.817 C9.2@64.762,59.182 64.766,59.178 64.766,58.805 v1(64.77,58.801) ; v1(65.151,54.785) R9.2@65.151,55.605
  Bottom_6 w0.25: R156.2@25.933,78.682 v1@25.933,79.37 ; v1(36.875,41.332) 36.895,41.312 U3.P19@37.278,41.312 ; v1(36.903,43.239) 36.926,43.262 U3.L19@37.278,43.262 ; v1(36.903,45.209) 36.906,45.212 U3.H19@37.278,45.212 ; U3.C17@38.578,48.462 38.587,48.471 38.587,48.912 v1(38.616,48.941) ; v1(41.178,39.637) U3.T13@41.178,40.012 ; U3.F13@41.178,46.512 41.178,46.876 v1(41.189,46.887) ; U3.G7@45.078,45.862 v1(45.403,45.537) ; U3.L3@47.678,43.262 47.894,43.262 47.905,43.274 48.012,43.274 v1(48.04,43.303)
  other v1: 68.671,57.381 68.671,58.041 68.644,58.702 25.93,79.373
3V3_COM: C133.2 C146.2 C147.2 C148.2 C149.2 C150.2 C151.2 C153.2 C154.2 C155.2 C157.2 C158.2 C161.2 C162.2 C178.2 J12.03 J12.04 J12.17 J12.18 J14.2 R45.2 R47.2 R191.2 R192.2 R212.2 U14.1 U15.1 U16.1 U17.1 U18.3 U19.3 U20.5 U20.12 VR1.2 VR1.4 | length 301.8
  Top_1 w0.15: v1(55.88,50.546) 55.898,50.564 56.761,50.564 R192.2@56.779,50.581 ; R191.2@63.359,46.228 63.363,46.232 63.9,46.232 v1(63.904,46.236)
  Top_1 w0.2: R212.2@55.892,5.114 55.895,5.117 56.627,5.117 v1(56.631,5.121) ; C161.2@57.667,48.259 57.677,48.269 58.392,48.269 v1(58.402,48.28) 59.485,48.28 U20.5@59.506,48.301 ; C162.2@62.172,52.324 v1(63.881,52.324) 63.881,50.959 U20.12@63.938,50.902
  Top_1 w0.254: J12.03@14.83,13.1 14.839,13.09 16.374,13.09 v1(16.383,13.081) ; J12.04@14.83,14.1 14.839,14.091 16.374,14.091 v1(16.383,14.081) ; J14.2@18.837,75.21 18.843,75.216 v1(18.843,76.309) ; v1(19.685,13.081) 19.694,13.09 24.001,13.09 J12.18@24.01,13.1 ; v1(19.685,14.081) 19.694,14.091 24.001,14.091 J12.17@24.01,14.1 ; v1(75.856,59.86) 76.46,59.86 76.733,59.586 C178.2@76.733,58.144
  Top_1 w0.3: v1(18.215,27.601) 18.796,28.182 U18.3@18.796,29.902 ; v1(24.438,50.588) 25.019,51.169 U19.3@25.019,52.889 ; C133.2@55.497,74.93 C147.2@55.497,75.909 55.622,76.034 55.622,76.102 v1@56.147,76.627 ; v1(56.147,76.653) 56.147,77.116 U14.1@56.258,77.226 ; v1(57.6,82.888) 57.619,82.869 57.619,82.083 57.737,81.965 C148.2@57.737,81.266 ; C148.2@57.735,81.265 C151.2@57.735,80.264 57.735,80.239 57.86,80.114 57.885,80.114 58.269,79.73 58.269,79.192 U16.1@58.237,79.161 ; v1(64.018,76.565) 64.713,77.261 U15.1@65.023,77.261 65.168,77.116 65.51,77.116 66.048,76.578 66.705,75.921 C149.2@67.266,75.921 C146.2@67.266,74.93 ; v1(66.395,82.883) 66.392,82.879 66.392,81.268 C150.2@66.388,81.265 C153.2@66.388,80.264 66.388,80.239 66.513,80.114 66.538,80.114 66.873,79.779 U17.1@66.873,79.161
  PWR_4 w0.254: v1(63.881,52.324) 63.892,52.313 63.892,46.247 v1(63.904,46.236)
  PWR_4 w0.3: v1(16.383,13.081) v1(16.383,14.081) 16.822,14.52 18.471,14.52 v1(19.05,15.099) ; v1(56.631,5.121) 55.402,6.35 23.495,6.35 20.461,9.384 20.461,12.305 v1(19.685,13.081) v1(19.685,14.081) 19.685,14.464 v1(19.05,15.099) ; v1(57.6,82.888) 57.6,85.005 57.812,85.217 64.061,85.217 v1(66.395,82.883) 69.987,79.291 69.987,66.203 71.348,64.842 74.865,64.842 75.856,63.85 v1(75.856,59.86) ; 57.776,85.217 27.706,85.217 18.832,76.343 18.832,62.702 24.438,57.096 v1(24.438,50.588) 21.717,47.867 21.717,35.941 18.215,32.439 v1(18.215,27.601) 18.215,18.119 19.05,17.284 v1(19.05,16.129) v1(19.05,15.099)
  Bottom_6 w0.15: v1(56.147,76.653) 56.147,77.991 57.61,79.454 ; v1(57.6,82.888) 57.61,82.878 57.61,79.454 ; v1(64.018,76.565) 64.018,76.571 63.5,77.089 59.055,77.089 58.42,77.724 58.42,78.644 57.61,79.454
  Bottom_6 w0.3: v1(18.215,27.601) 18.227,27.588 18.981,27.588 ; R45.2@18.23,15.113 18.237,15.106 19.043,15.106 v1(19.05,15.099) ; R47.2@18.23,16.129 v1@19.023,16.129 ; C154.2@18.981,27.051 18.981,27.588 ; C155.2@18.981,28.125 18.981,27.588 ; v1(24.438,50.588) 24.45,50.575 25.204,50.575 ; C157.2@25.204,50.038 25.204,50.575 ; C158.2@25.204,51.112 25.204,50.575 ; v1(55.88,50.546) 60.452,50.546 ; v1(58.402,48.28) 59.924,48.28 60.452,48.808 60.452,50.546 ; VR1.2@75.833,61.849 75.833,59.883 v1(75.856,59.86) 75.833,59.836 VR1.4@75.833,56.637 ; 60.452,50.546 62.23,52.324 v1(63.881,52.324) 65.709,52.324 69.434,56.049 VR1.4@75.287,56.049 ; VR1.4@75.287,56.049 VR1.4@75.833,56.049 75.833,56.509 VR1.4@75.833,56.637 ; VR1.4@75.287,56.049 74.827,56.509 75.704,56.509 VR1.4@75.833,56.637
3V3_eMMC: C45.2 C46.2 C106.2 C107.2 C108.2 C109.2 C110.2 C111.2 C112.2 C113.2 C114.2 C115.2 C118.2 C119.2 C120.2 C121.2 C122.2 C123.2 C124.2 C125.2 C126.2 C127.2 C179.2 C181.2 C182.2 R132.1 R133.1 R134.1 R135.1 R136.1 R137.1 R138.1 R139.1 R140.1 R141.1 R142.1 R143.1 R144.1 R145.1 R146.1 R147.1 R148.1 R149.1 R213.2 U3.F9 U3.W17 U5.F2@27.4,25.273 U5.F3@27.4,24.273 U5.F4@27.4,23.273 U5.F5@27.4,22.273 U5.F6@27.4,21.273 U5.F7@27.4,20.273 U5.F8@27.4,19.273 U5.F9@27.4,18.273 U5.H3@29.4,24.273 U5.H8@29.4,19.273 U5.L2@32.4,25.273 U5.L4@32.4,23.273 U5.L7@32.4,20.273 U5.L9@32.4,18.273 U5.P3@35.4,24.273 U5.P8@35.4,19.273 U6.F2@25.368,69.564 U6.F3@25.368,68.564 U6.F4@25.368,67.564 U6.F5@25.368,66.564 U6.F6@25.368,65.564 U6.F7@25.368,64.564 U6.F8@25.368,63.564 U6.F9@25.368,62.564 U6.H3@27.368,68.564 U6.H8@27.368,63.564 U6.L2@30.368,69.564 U6.L4@30.368,67.564 U6.L7@30.368,64.564 U6.L9@30.368,62.564 U6.P3@33.368,68.564 U6.P8@33.368,63.564 VR2.2 VR2.4 | length 329.6
  Top_1 w0.15: v1(32.702,17.026) 32.706,17.022 33.963,17.022 R138.1@33.967,17.018
  Top_1 w0.2: R140.1@36.313,21.273 36.451,21.435 v1(37.05,21.791) 36.45,22.111 R141.1@36.313,22.273 ; v1@43.783,46.892 C46.2@43.783,47.245 43.502,47.245 43.353,47.394 43.353,48.462 43.999,49.108 v1(43.999,59.058) ; R213.2@50.509,5.114 50.513,5.117 51.245,5.117 v1(51.248,5.121)
  Top_1 w0.25: C45.2@38.578,37.299 v1(38.578,37.687)
  Top_1 w0.254: v1(28.915,59.72) 28.901,59.734 28.901,60.311 C119.2@28.887,60.325 28.887,61.094 v1(29.93,62.137)
  Top_1 w0.4: v1(25.38,59.741) 25.38,61.337 25.352,61.364 25.327,61.364 24.868,61.823 v1(24.868,62.064) v1(24.868,63.064) ; C125.2@25.406,69.564 25.381,69.564 24.881,69.064 v1(24.868,69.064) 24.868,68.473 ; C120.2@25.412,64.516 24.868,64.516 ; C127.2@25.412,66.548 24.975,66.548 24.868,66.441 ; C123.2@25.412,68.58 24.975,68.58 24.868,68.473 ; v1(26.868,63.064) v1(24.868,63.064) ; v1(26.9,24.773) 26.9,24.182 ; v1@26.932,24.773 C114.2@27.416,25.257 ; C106.2@27.412,16.034 27.412,17.046 27.384,17.073 27.359,17.073 26.9,17.532 v1(26.9,17.773) v1(26.9,18.773) ; C126.2@27.428,68.564 v1(27.926,68.067) ; v1(27.432,14.224) C106.2@27.432,16.022 ; C108.2@27.444,20.225 26.9,20.225 ; C113.2@27.444,22.257 27.007,22.257 26.9,22.15 ; C112.2@27.444,24.289 27.007,24.289 26.9,24.182 ; v1@27.93,68.067 28.327,68.464 28.419,68.464 28.494,68.539 R145.1@28.494,68.564 ; R145.1@28.494,68.652 R143.1@28.494,69.564 ; v1(28.9,18.773) v1(26.9,18.773) ; C124.2@29.337,62.614 v1(29.93,62.137) ; C111.2@29.46,24.273 v1(29.958,23.776) ; v1(29.868,67.014) 29.899,67.014 30.295,66.618 30.367,66.618 30.442,66.543 R149.1@30.442,66.518 ; v1@29.962,23.776 30.359,24.173 30.451,24.173 30.526,24.248 R134.1@30.526,24.273 ; C122.2@30.442,64.393 30.517,64.493 v1(30.86,65.011) ; R134.1@30.526,24.361 R132.1@30.526,25.273 ; C115.2@31.369,18.323 v1(31.962,17.846) ; R137.1@31.369,20.773 31.369,20.798 31.444,20.873 31.469,20.873 31.865,21.269 31.865,21.728 R142.1@31.907,21.77 31.897,21.779 v1(31.897,22.741) ; C107.2@31.935,16.002 31.877,16.06 31.877,16.96 R139.1@31.819,17.018 ; C182.2@32.474,20.102 32.549,20.202 v1(32.892,20.72) ; v1(32.702,17.026) 32.694,17.018 R139.1@31.819,17.018 ; R136.1@32.943,17.873 32.916,17.846 v1(31.962,17.846) ; C181.2@33.106,63.514 33.206,63.589 v1(33.868,64.064) ; R146.1@33.381,68.539 33.381,68.564 33.865,69.048 v1(33.875,69.048) R144.1@33.387,69.535 ; R147.1@34.281,65.564 34.356,65.639 34.356,65.664 v1@34.813,66.121 ; R148.1@34.281,66.564 34.281,66.539 34.356,66.464 R148.1@34.469,66.464 ; v1(34.961,66.132) v1@34.824,66.132 ; C109.2@35.138,19.223 35.238,19.298 v1(35.9,19.773) ; R135.1@35.413,24.248 35.413,24.273 35.897,24.757 v1(35.907,24.757) R133.1@35.419,25.244 ; v1(24.868,63.064) 24.868,64.516 ; 24.868,64.516 v1(24.868,65.064) v1(24.868,66.064) 24.868,66.441 ; 24.868,66.441 v1(24.868,67.064) v1(24.868,68.064) 24.868,68.473 ; v1(26.9,18.773) 26.9,20.225 ; 26.9,20.225 v1(26.9,20.773) v1(26.9,21.773) 26.9,22.15 ; 26.9,22.15 v1(26.9,22.773) v1(26.9,23.773) 26.9,24.182 ; R139.1@31.819,17.018 31.819,17.703 v1(31.962,17.846) ; R148.1@34.469,66.464 34.802,66.132 v1@34.824,66.132 ; R148.1@34.469,66.464 v1@34.813,66.121 ; v1@34.813,66.121 v1@34.824,66.132
  Top_1 w0.5: v1(71.12,17.145) v1(71.12,18.161) v1(71.12,19.304) 75.946,19.304 ; VR2.2@75.946,16.785 75.946,19.304 ; C179.2@76.719,25.527 76.719,23.358 VR2.4@75.946,22.585 ; VR2.4@77.292,21.76 77.292,20.65 75.946,19.304 ; 75.946,19.304 74.6,20.65 74.6,21.76 75.425,22.585 VR2.4@75.946,22.585 ; 75.946,19.304 VR2.4@75.946,22.585
  PWR_4 w0.15: v1(29.868,70.064) 30.884,69.048 v1(33.875,69.048) ; v1(31.9,25.773) 35.433,29.306 35.433,34.542 v1(38.578,37.687) ; 32.892,21.767 37.026,21.767 v1(37.05,21.791) ; 32.893,24.78 35.884,24.78 v1(35.907,24.757) ; v1(33.868,64.064) 33.916,64.112 34.578,64.112 34.961,64.494 v1(34.961,66.132)
  PWR_4 w0.2: v1(51.248,5.121) 52.038,4.332 59.323,4.332 62.387,7.396 62.387,13.58 62.377,13.589
  PWR_4 w0.4: v1(25.38,59.741) 25.38,58.781 ; v1(27.432,14.224) 27.432,14.859 ; v1(29.868,67.014) 29.86,67.006 28.915,67.006 ; v1(29.868,70.064) 29.868,70.009 v1(27.926,68.067) 28.915,67.078 28.915,67.006 ; v1(29.958,23.776) 30.993,22.741 v1(31.897,22.741) ; v1(31.9,25.773) 32.893,24.78 32.893,23.758 31.897,22.762 32.892,21.767 v1(32.892,20.72) 32.702,20.529 32.702,19.734 ; v1(33.868,64.064) 31.807,64.064 v1(30.86,65.011) 28.915,65.011 ; v1(35.9,19.773) 32.741,19.773 32.702,19.734 ; v1(43.999,59.058) 42.842,60.215 28.915,60.215 ; v1(71.12,19.304) v1(71.12,18.161) v1(71.12,17.145) 71.12,15.898 68.811,13.589 62.377,13.589 33.513,13.589 31.862,15.24 ; 25.38,58.781 25.38,45.129 22.86,42.61 22.86,35.87 24.257,34.473 24.257,16.383 25.4,15.24 27.051,15.24 27.432,14.859 ; 25.38,58.781 28.68,58.781 28.915,59.016 v1(28.915,59.72) 28.915,60.215 ; 27.432,14.859 27.813,15.24 31.862,15.24 ; 28.915,60.215 28.915,65.011 ; 28.915,65.011 28.915,67.006 ; 31.862,15.24 32.072,15.24 32.702,15.869 v1(32.702,17.026) 32.702,19.734
  Bottom_6 w0.25: v1(38.578,37.687) U3.W17@38.578,38.062 ; U3.F9@43.778,46.512 v1(43.778,46.887)
  Bottom_6 w0.4: v1(24.868,62.064) U6.F9@25.368,62.564 v1(24.868,63.064) U6.F8@25.368,63.564 v1(24.868,64.064) U6.F7@25.368,64.564 v1(24.868,65.064) U6.F6@25.368,65.564 v1(24.868,66.064) U6.F5@25.368,66.564 v1(24.868,67.064) U6.F4@25.368,67.564 v1(24.868,68.064) U6.F3@25.368,68.564 v1(24.868,69.064) U6.F2@25.368,69.564 ; v1(26.868,63.064) U6.H8@27.368,63.564 ; v1(26.9,17.773) U5.F9@27.4,18.273 v1(26.9,18.773) U5.F8@27.4,19.273 v1(26.9,19.773) U5.F7@27.4,20.273 v1(26.9,20.773) U5.F6@27.4,21.273 v1(26.9,21.773) U5.F5@27.4,22.273 v1(26.9,22.773) U5.F4@27.4,23.273 v1(26.9,23.773) U5.F3@27.4,24.273 v1(26.9,24.773) U5.F2@27.4,25.273 ; U6.H3@27.406,68.564 27.406,68.551 27.89,68.067 v1(27.926,68.067) ; v1(28.9,18.773) U5.H8@29.4,19.273 ; U5.H3@29.438,24.273 29.438,24.26 29.922,23.776 v1(29.958,23.776) ; v1(29.868,67.014) 29.868,67.04 30.368,67.54 U6.L4@30.368,67.564 ; v1(29.868,70.064) U6.L2@30.368,69.564 ; v1(29.93,62.137) 30.357,62.564 U6.L9@30.368,62.564 ; U6.L7@30.368,64.564 30.392,64.564 30.839,65.011 v1(30.86,65.011) ; v1(31.897,22.741) 31.897,22.746 32.4,23.249 U5.L4@32.4,23.273 ; v1(31.9,25.773) U5.L2@32.4,25.273 ; v1(31.962,17.846) 32.389,18.273 U5.L9@32.4,18.273 ; U5.L7@32.4,20.273 32.424,20.273 32.871,20.72 v1(32.892,20.72) ; U6.P8@33.368,63.564 v1(33.868,64.064) ; U6.P3@33.368,68.564 v1@33.868,69.064 ; U5.P8@35.4,19.273 v1(35.9,19.773) ; U5.P3@35.4,24.273 v1@35.9,24.773
5V: C1.2 C4.2 C10.2 C12.2 C14.2 C15.2 C174.2 C175.2 C177.2 C180.2 L5.2 R12.2 R209.2 R210.1 U1.4 U1.10 U1.15 U1.20 U1.26 U1.31 VR1.3 VR2.3 | length 65.2
  Top_1 w0.15: v1(62.67,64.287) 63.347,64.287 63.627,64.567 R12.2@63.627,65.971
  Top_1 w0.2: R209.2@61.274,5.114 61.278,5.117 62.01,5.117 v1(62.013,5.121)
  Top_1 w0.5: C175.2@74.811,12.573 74.875,12.509 77.408,12.509 ; C174.2@77.408,11.43 77.408,12.509 ; v1(78.127,59.085) 78.13,59.089 v1(78.13,59.944) 77.083,61.47 C177.2@77.052,61.506 ; VR2.3@78.246,16.785 78.205,16.744 78.205,15.253 77.558,14.606 77.558,13.738 C180.2@77.408,13.589 77.408,12.509 ; C177.2@77.052,61.506 77.052,61.551 C177.2@76.733,61.87 C177.2@77.052,61.506
  SIGNAL_3 w0.127: v1(62.013,5.121) 62.013,4.489 62.435,4.067 68.007,4.067 68.453,4.513 68.453,9.398 69.241,10.186 v1(74.104,10.186)
  PWR_4 w0.2: v1(60.703,74.806) 60.703,77.594
  Bottom_6 w0.2: v1(60.703,74.806) 60.706,74.803 61.096,74.803 ; C14.2@61.087,75.303 61.096,75.293 61.096,74.803 ; U1.4@61.106,73.493 61.096,73.503 61.096,74.803 ; R210.1@73.195,24.681 72.405,24.681 71.876,24.152 71.876,15.822 73.986,13.712 74.278,13.712 L5.2@75.653,12.337
  Bottom_6 w0.254: v1@57.421,68.822 ccw(c57.415,69.076) 57.595,68.896 58.331,69.632 cw(c58.51,69.452) 58.484,69.705 58.633,69.72 U1.26@58.856,69.743 ; v1@57.421,73.165 cw(c57.415,72.911) 57.595,73.09 58.331,72.354 ccw(c58.51,72.534) 58.484,72.281 58.633,72.266 U1.31@58.856,72.243 ; C15.2@61.229,66.922 61.34,67.059 61.609,67.541 61.609,68.27 U1.20@61.606,68.493 ; U1.15@63.856,69.743 64.079,69.72 64.227,69.705 cw(c64.201,69.452) 64.38,69.632 65.117,68.896 ccw(c65.296,69.076) v1(65.291,68.822) ; U1.10@63.856,72.243 64.079,72.266 64.227,72.281 ccw(c64.201,72.534) 64.38,72.354 65.117,73.09 cw(c65.296,72.911) v1(65.291,73.165)
  Bottom_6 w0.5: v1(78.127,59.085) 78.13,59.089 v1(78.13,59.944) 78.13,61.024 VR1.3@78.133,61.849
  other v1: 75.137,10.187 76.171,10.187 77.204,10.187 60.81,64.268 61.43,64.268 62.05,64.287 56.496,68.822 56.946,68.822 57.421,68.822 65.766,68.822 66.216,68.822 56.496,73.165 56.946,73.165 57.421,73.165 65.766,73.165 66.216,73.165
12V: C165.2 C166.2 C173.2 D5.1 R200.2 R201.2 R202.2 SB2.2 U22.6 U23.7 | length 54.9
  Top_1 w0.2: R202.2@66.696,5.115 66.699,5.119 67.432,5.119 v1(67.435,5.122)
  Top_1 w0.5: C173.2@76.719,32.004 76.454,32.269 v1(76.454,33.401) v1(77.343,33.401)
  SIGNAL_3 w0.127: v1(67.435,5.122) 67.435,9.877 66.448,10.865 58.345,10.865 57.277,11.932 57.277,13.377 72.024,28.124 72.024,30.749 73.025,31.75 75.805,31.75 76.454,32.399 v1(76.454,33.401)
  Bottom_6 w0.254: v1@71.067,73.084 72.581,73.084 ; R200.2@72.581,72.618 72.581,73.084 ; R201.2@72.581,73.634 72.581,73.084
  Bottom_6 w0.5: U23.7@76.464,31.895 76.464,33.391 v1(76.454,33.401) v1(77.343,33.401)
  other v1: 73.158,65.831 75.553,65.827 73.141,68.281 75.571,68.3 71.06,71.566 71.06,72.074 71.06,72.583 71.06,73.091
12V_CONN: C167.2 C168.2 J4.1 J4.2 J6.1 J6.2 J6.3 R203.1 R206.2 SB2.1 U22.5 | length 7.2
  Top_1 w0.2: v1(71.8,70.535) 72.173,70.907 73.615,70.907 73.732,70.79 73.732,70.282 C168.2@73.665,70.215 ; v1(77.07,73.545) 77.823,74.083 v1(78.787,75.791)
  Bottom_6 w0.2: v1(71.8,70.535) 71.803,70.532 72.527,70.532 R203.1@72.581,70.586 ; v1(78.787,75.791) 78.801,75.805 79.546,75.805 R206.2@79.56,75.819